# Altium PCB PCB_CANCELADOR.PcbDoc
Units mm, origin at the board's own origin, x right, y up, seen from the top; angles counter-clockwise.
Board outline 92.46 x 95.76 mm, 2 copper layers (Top Layer, Bottom Layer); 47 components, 59 nets, 174 pads, 17 vias.
Unrouted connection lines stored in the file: 82.
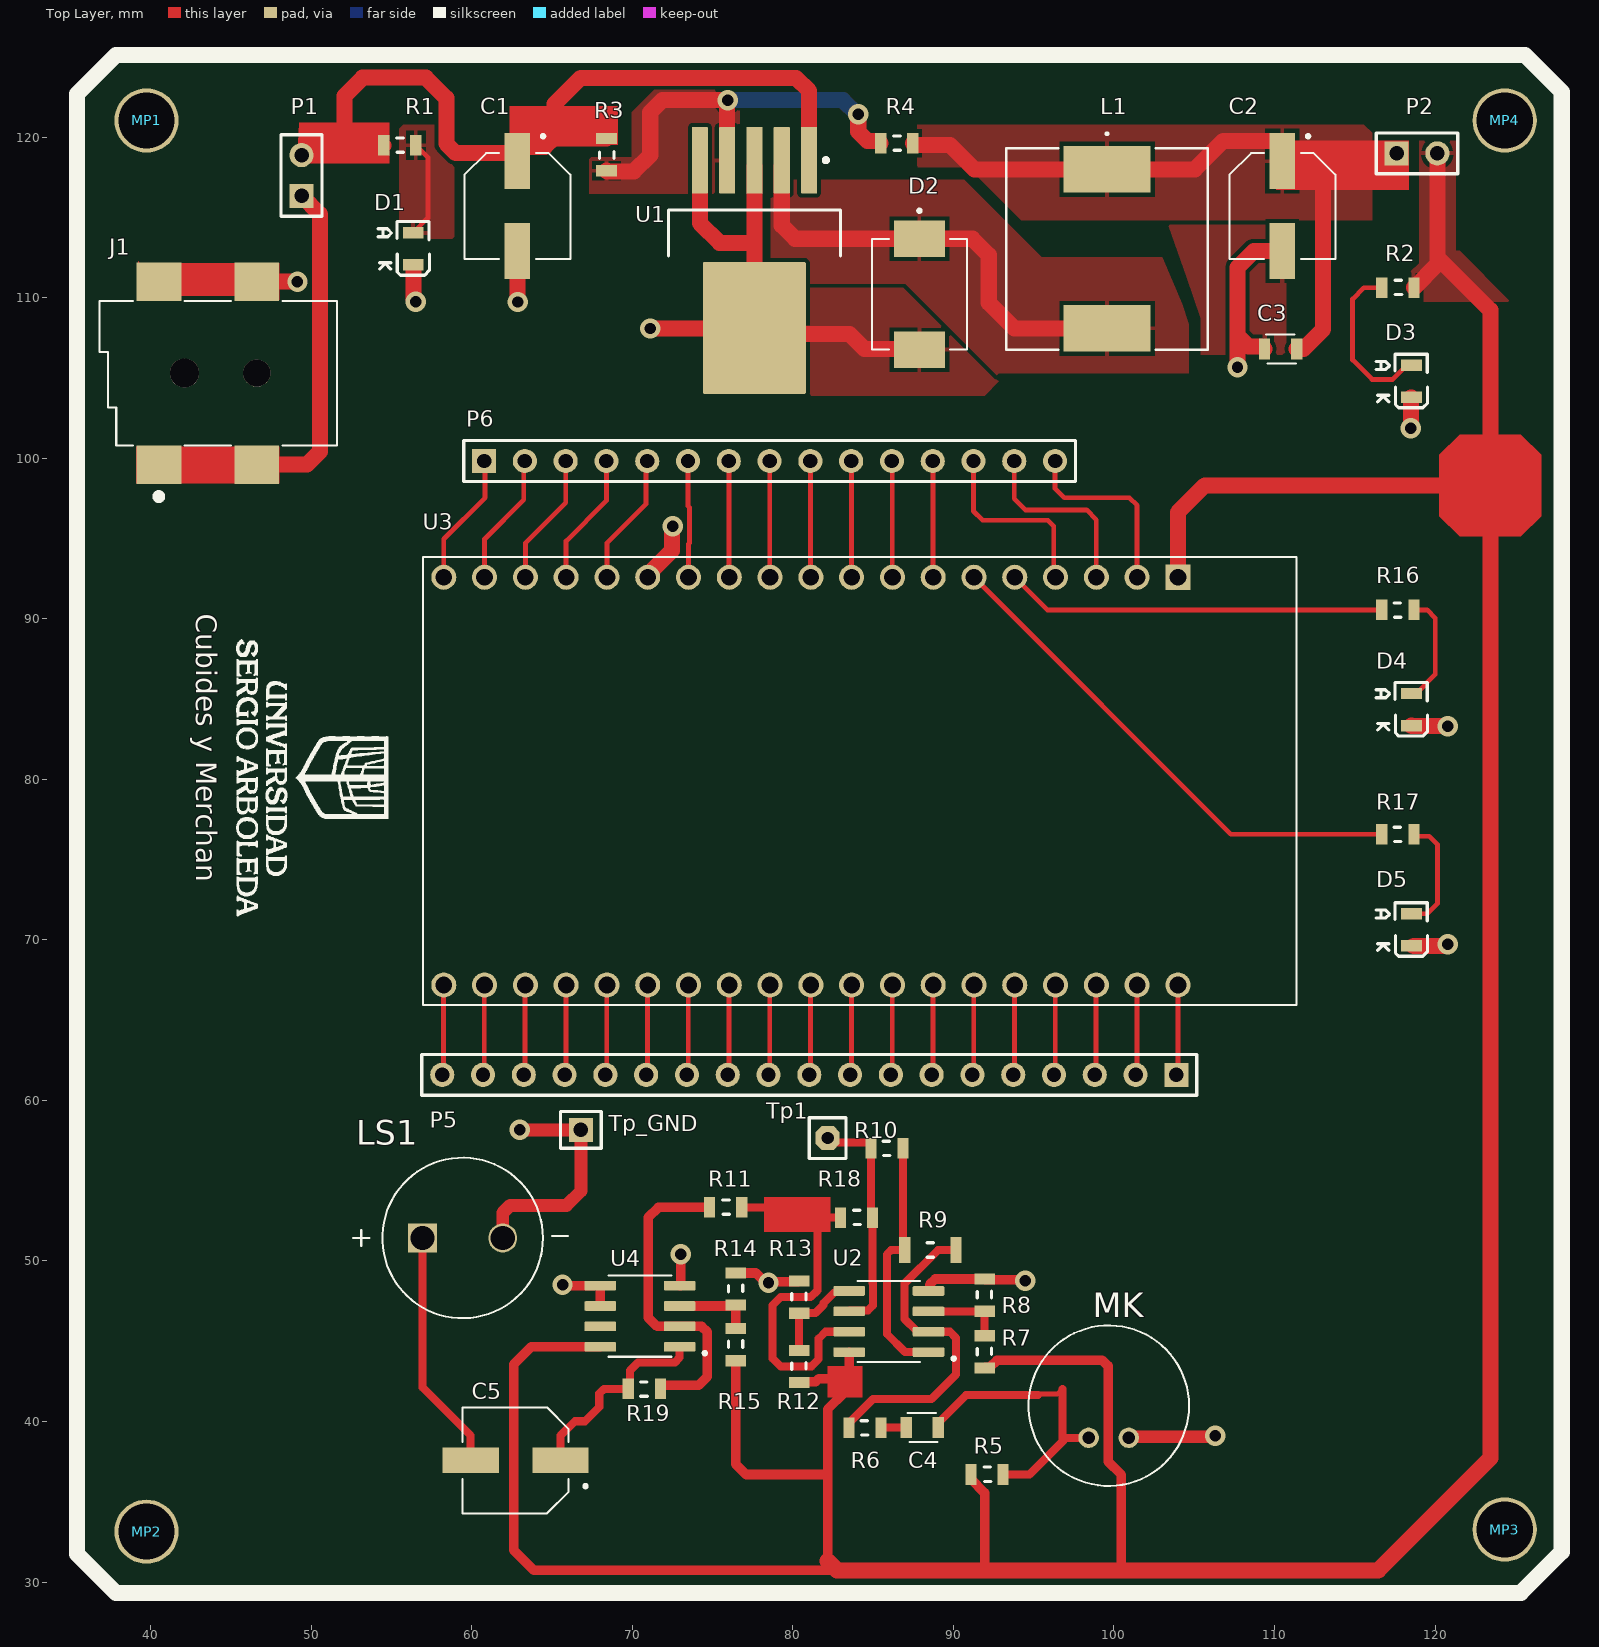
[diagram p0: Top Layer view]
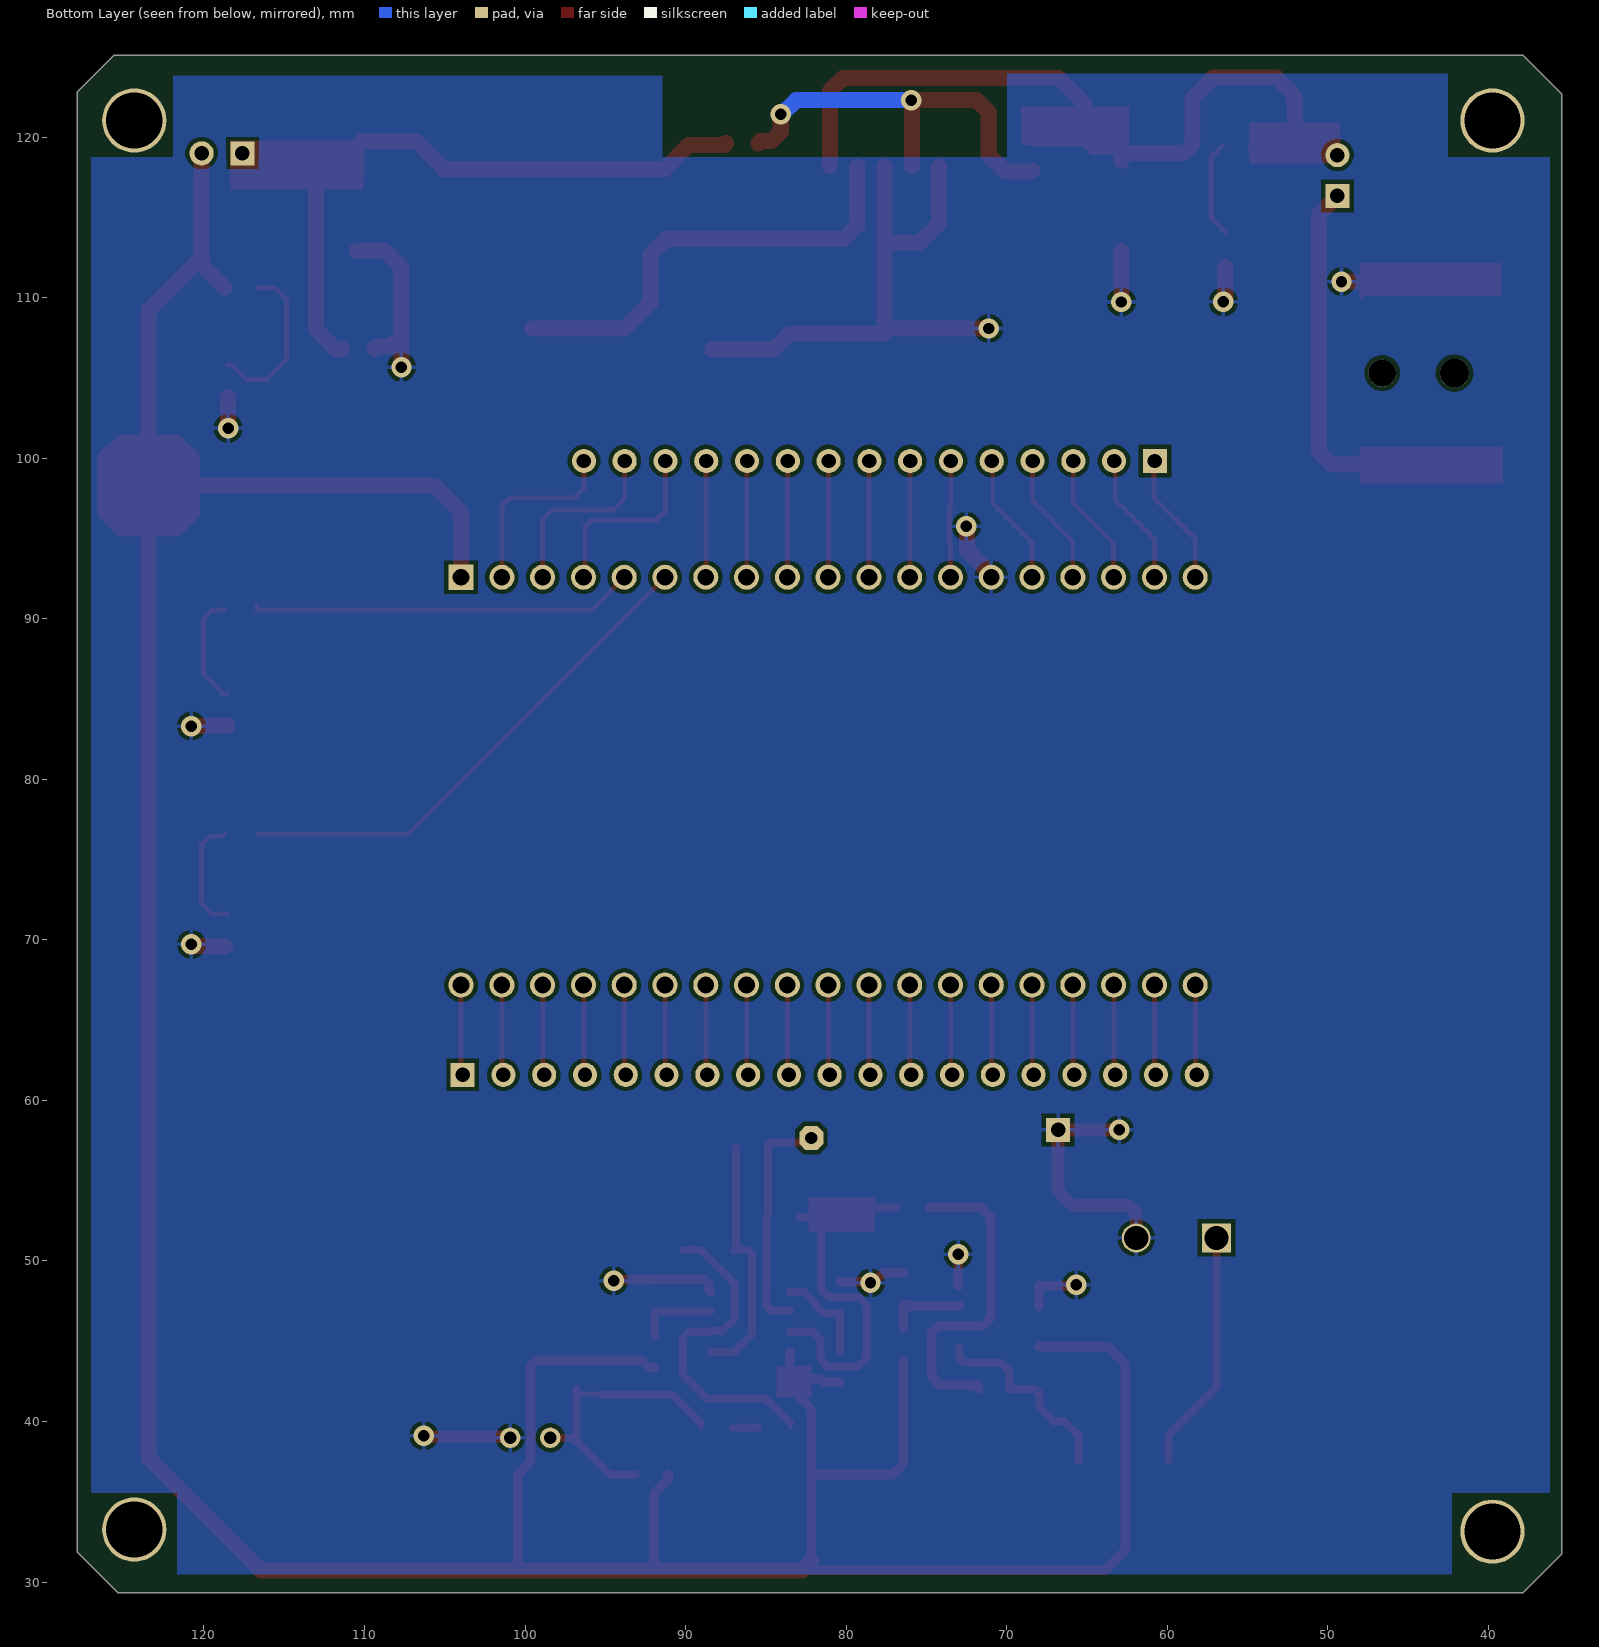
[diagram p1: Bottom Layer view, seen from below]

## Layer stack, top to bottom
Top Solder: solder mask 0.0102, Solder Resist, Dk 3.5
Top Layer: signal copper 0.0356
Dielectric 1: dielectric 0.32, FR-4, Dk 4.8
Bottom Layer: signal copper 0.0356
Bottom Solder: solder mask 0.0102, Solder Resist, Dk 3.5

## Board outline
35.433,31.75 35.433,122.682 37.846,125.095 125.603,125.095 125.666,125.031 127.889,122.809 127.889,31.877 125.349,29.337 37.846,29.337

## Design rules (kind name [scope] priority, off if disabled: settings)
Clearance [All] p1: gap=0.254 ignorepadtopadclearanceinfootprint=FALSE except(0: Arc-Hole Track-Hole SMDPad-Hole THPad-Hole Via-Hole Fill-Hole Poly-Hole Region-Hole Text-Hole)
HoleSize [All] p1: absolutevalues=TRUE maxlimit=3.52 minlimit=0.025 maxpercent=80.000 minpercent=20.000
PolygonConnect [All] p1: connectstyle=Relief reliefconductorwidth=0.254 reliefentries=4 polygonreliefangle="90 Angle" airgapwidth=0.254
RoutingVias [All] p1: holewidth=0.711 width=1.27 viastyle="Through Hole" minholewidth=0.711 minwidth=1.27 maxholewidth=0.711 maxwidth=1.27
SilkToSolderMaskClearance [IsPad] p1: minsilkscreentomaskgap=0.1 clearancetoexposedcopper=TRUE
SolderMaskExpansion [All] p1: expansion=0.102 istentingtop=FALSE
Width Width_GND [All] p1: maxlimit=3 minlimit=0.3 preferedwidth=0.8 minimp=50.000000 maximp=50.000000 favimp=50.000000
28 further rules are at their usual default settings.

## Classes and differential pairs
component class U_Etapa_Regulacion: C1 C2 C3 D1 D2 D3 J1 L1 P1 P2 R1 R2 R3 R4 U1
component class U_Etapa_Control_Ruido: C4 C5 D4 D5 LS1 MK MP1 MP2 MP3 MP4 P5 P6 R5 R6 R7 R8 R9 R10 R11 R12 R13 R14 R15 R16 R17 R18 R19 Tp1 Tp_GND U2 U3 U4

## Components (designator, comment, footprint, x,y, rotation, side; value= is the part's Value field where it differs from the comment)
C1 "100uF" CAP_16SVPG220M 62.845,115.702 r270 top
C2 "220uF" CAP_16SVPG220M 110.49,115.702 r270 top
C3 "0.1uF" CAPC4632X221N 109.329,106.807 r0 top
C4 "0.1uF" CAPC4632X221N 87.014,39.624 r0 top
C5 "100uF" CAP_16SVPG220M 62.738,37.582 r180 top
D1 "LED2" 3.2X1.6X1.1 56.368,113.796 r270 top
D2 "SS34" DIOM7959X265N 87.884,110.21 r270 top
D3 "LED2" 3.2X1.6X1.1 118.532,105.537 r270 top
D4 "LED2" 3.2X1.6X1.1 118.532,85.09 r270 top
D5 "LED2" 3.2X1.6X1.1 118.532,71.378 r270 top
J1 "*" CUI_PJ-002BH-SMT-TR 40.513,99.598 r180 top
L1 "33uH" IND_CDRH127/LDNP-470MC_SUM 99.568,113.038 r270 top
LS1 "Altavoz" SPKR_AST-1732MR-R 59.436,51.435 r0 top
MK "Microfono" CUI_CMA-6542PF 99.675,40.989 r90 top
MP1 "5205980-1" Tornillo 39.751,121.031 r0 top
MP2 "5205980-1" Tornillo 39.751,33.147 r0 top
MP3 "5205980-1" Tornillo 124.333,33.274 r0 top
MP4 "5205980-1" Tornillo 124.333,121.031 r0 top
P1 "Header 2" HDR1X2 49.403,116.332 r90 top
P2 "Header 2" HDR1X2 117.602,118.984 r0 top
P5 "Header 19" HDR1X19 103.886,61.595 r180 top
P6 "Header 15" HDR1X15 60.773,99.822 r0 top
R1 "Res3" J1-0805 55.27,119.485 r180 top value=330
R2 "Res3" J1-0805 117.434,110.617 r180 top value=330
R3 "Res3" J1-0805 68.397,119.152 r90 top value=1K
R4 "Res3" J1-0805 86.221,119.612 r180 top value=3.3K
R5 "Res3" J1-0805 91.847,36.703 r180 top value=10K
R6 "Res3" J1-0805 84.746,39.624 r0 top value=1K
R7 "Res3" J1-0805 91.948,44.089 r270 top value=10K
R8 "Res3" J1-0805 91.948,47.625 r270 top value=10K
R9 "Res3" J1-1206 87.72,50.673 r180 top value=470K
R10 "Res3" J1-0805 86.118,57.023 r0 top value=10k
R11 "Res3" J1-0805 75.565,53.34 r180 top value=10K
R12 "Res3" J1-0805 80.391,43.18 r270 top value=10k
R13 "Res3" J1-0805 80.391,47.498 r270 top value=10k
R14 "Res3" J1-0805 76.454,48.006 r270 top value=10k
R15 "Res3" J1-0805 76.454,44.542 r270 top value=10k
R16 "Res3" J1-0805 117.934,90.551 r0 top value=330
R17 "Res3" J1-0805 117.934,76.581 r0 top value=330
R18 "Res3" J1-0805 83.713,52.705 r180 top value=10k
R19 "Res3" J1-0805 71.005,42.037 r0 top value=30k
Tp1 "Test_point" Test_Point 82.169,57.658 r0 top
Tp_GND "Test_point" Test_point_GND 66.802,58.166 r90 top
U1 "LM2596S-ADJ/NOPB" KTT0005B_N 77.611,112.307 r270 top
U2 "LM358AMX/NOPB" SOIC127P599X175-8N 85.979,46.228 r180 top
U3 "*" MODULE_ESP32-DEVKITC-32D 84.223,79.883 r270 top
U4 "LM358AMX/NOPB" SOIC127P599X175-8N 70.481,46.562 r180 top

## Footprints (in the part's own frame and the unit in brackets; to place one, negate y for a bottom-side part, rotate by r counter-clockwise, add the part's x,y. Pads: shape width x height; smd on the part's side, far side on the other; paste and mask are expansions set on the pad)
3.2X1.6X1.1 [mm] "SMT LED; 2 Flat Leads"
  rect 0.7x1.28 smd: 1(-0.25,0) 2(1.75,0)
  silkscreen extent -0.94,-2.2 2.4,1
CAP_16SVPG220M [mm]
  rect 3.5x1.6 smd: 1(-2.8,0) 2(2.8,0)
  silkscreen extent -4.45,-3.3 3.3,3.3
CAPC4632X221N [mm]
  rect 0.7x1.3 smd: 1(0.05,0) 2(2.05,0)
  silkscreen extent 0.14,-0.9 2,0.9
CUI_CMA-6542PF [mm]
  round 1.278 hole 0.77: 1(-2,1.25) 2(-2,-1.25)
  silkscreen extent -5,-5 5,5
CUI_PJ-002BH-SMT-TR [mm]
  rect 2.8x2.4 smd: 1A(0,0) 1B(-6.1,0) 2(-6.1,-11.4) 3(0,-11.4)
  round 1.7 hole 1.7 unplated: ""(-6.1,-5.7)
  round 1.8 hole 1.8 unplated: ""(-1.6,-5.7)
  silkscreen extent -11.1,-10.2 3.7,2.19
DIOM7959X265N [mm]
  rect 2.25x3.18 smd: 1(3.455,0) 2(-3.455,0)
  silkscreen extent -5.3,-2.95 3.44,2.95
HDR1X2 [mm] "Connector; Header; 2 Position"
  rect 1.5x1.5 hole 0.9: 1(0,0)
  round 1.5 hole 0.9: 2(2.54,0)
  silkscreen extent -1.27,-1.27 3.81,1.27
HDR1X15 [mm] "Connector; Header; 15 Position"
  rect 1.5x1.5 hole 0.9: 1(0,0)
  round 1.5 hole 0.9: 2(2.54,0) 3(5.08,0) 4(7.62,0) 5(10.16,0) 6(12.7,0) 7(15.24,0) 8(17.78,0) 9(20.32,0) 10(22.86,0) 11(25.4,0) 12(27.94,0) 13(30.48,0) 14(33.02,0) 15(35.56,0)
  silkscreen extent -1.27,-1.27 36.83,1.27
HDR1X19 [mm] "Connector; Header; 19 Position"
  rect 1.5x1.5 hole 0.9: 1(0,0)
  round 1.5 hole 0.9: 2(2.54,0) 3(5.08,0) 4(7.62,0) 5(10.16,0) 6(12.7,0) 7(15.24,0) 8(17.78,0) 9(20.32,0) 10(22.86,0) 11(25.4,0) 12(27.94,0) 13(30.48,0) 14(33.02,0) 15(35.56,0) 16(38.1,0) 17(40.64,0) 18(43.18,0) 19(45.72,0)
  silkscreen extent -1.27,-1.27 46.99,1.27
IND_CDRH127/LDNP-470MC_SUM [mil]
  rect 114x213 smd: 1(-195,0) 2(195,0)
  silkscreen extent -285,-247 247,247
J1-0805 [mm] "Chip Resistor, Body 1.6x0.8mm, IPC High Density"
  rect 0.7x1.28 smd: 1(0.75,0) 2(-1.25,0)
  silkscreen extent -0.49,-0.46 -0.07,0.43, body extent -1.14,-0.37 0.56,0.59, height 0.9
J1-1206 [mm] "Chip Resistor, Body 1.6x0.8mm, IPC High Density"
  rect 0.7x1.62 smd: 1(0.75,0) 2(-2.45,0)
  silkscreen extent -1.05,-0.47 -0.64,0.44, body extent -1.74,-0.46 -0.04,0.5, height 0.9
KTT0005B_N [mm] "DPAK, 5-Leads, Body 10.65x9.65mm, Pitch 1.7mm, IPC Medium Density"
  rrect10% 4.15x1 smd: 1(-6.25,3.4) 2(-6.25,1.7) 3(-6.25,0) 4(-6.25,-1.7) 5(-6.25,-3.4)
  rrect2% 8.2x6.4 smd: 6(4.2,0)
  silkscreen extent -6.37,-5.35 -0.3,5.35, body extent -3.15,-5.32 6.5,5.33, height 4.83
MODULE_ESP32-DEVKITC-32D [mm]
  rect 1.56x1.56 hole 1.04: 1(-12.7,19.76)
  round 1.56 hole 1.04: 2(-12.7,17.22) 3(-12.7,14.68) 4(-12.7,12.14) 5(-12.7,9.6) 6(-12.7,7.06) 7(-12.7,4.52) 8(-12.7,1.98) 9(-12.7,-0.56) 10(-12.7,-3.1) 11(-12.7,-5.64) 12(-12.7,-8.18) 13(-12.7,-10.72) 14(-12.7,-13.26) 15(-12.7,-15.8) 16(-12.7,-18.34) 17(-12.7,-20.88) 18(-12.7,-23.42) 19(-12.7,-25.96) 20(12.7,19.76) 21(12.7,17.22) 22(12.7,14.68) 23(12.7,12.14) 24(12.7,9.6) 25(12.7,7.06) 26(12.7,4.52) 27(12.7,1.98) 28(12.7,-0.56) 29(12.7,-3.1) 30(12.7,-5.64) 31(12.7,-8.18) 32(12.7,-10.72) 33(12.7,-13.26) 34(12.7,-15.8) 35(12.7,-18.34) 36(12.7,-20.88) 37(12.7,-23.42) 38(12.7,-25.96)
  silkscreen extent -13.95,-27.25 13.95,27.15, body extent -13.97,-25.18 13.97,29.92, height 3.25
SOIC127P599X175-8N [mm]
  rrect25% 1.97x0.6 smd: 1(-2.47,1.905) 2(-2.47,0.635) 3(-2.47,-0.635) 4(-2.47,-1.905) 5(2.47,-1.905) 6(2.47,-0.635) 7(2.47,0.635) 8(2.47,1.905)
  silkscreen extent -4.14,-2.52 1.95,2.52, body extent -3,-2.45 3,2.45, height 1.75
SPKR_AST-1732MR-R [mm]
  rect 1.8x1.8 hole 1.5: 1(-2.5,0)
  round 1.8 hole 1.5: 2(2.5,0)
  silkscreen extent -6.81,-5 6.57,5
Test_Point [mm]
  oct 1.5x1.5 hole 0.77: 1(0,0)
  silkscreen extent -1.14,-1.27 1.14,1.27
Test_point_GND [mm]
  rect 1.5x1.5 hole 0.9: 1(0,0)
  silkscreen extent -1.14,-1.27 1.14,1.27
Tornillo [mm]
  round 4 hole 3.5: 1(0,0)

## Part data
C1 C2 C5: library part 16SVPG220M, Package=None, Availability=Unavailable, MP=16SVPG220M, Price=None
C3 C4: library part 1812CC104KAZ1A, "CAP,CERM,0.10UF,630V,X7R,1812; Dielectric Characteristic:X7R; Capacitance:100nF; Capacitance Tolerance:Â± 10%; Voltage Rating:630V; Temperature Coefficient:Â± 15%; Series:LT; Capacitor Case Style:1812; No. of Pins:2; Mounting Type:SMD; Operating Temperature Range:-55Â°C to +125Â°C; SVHC:No SVHC (18-Jun-2010)", Package=None, Availability=Unavailable, MP=1812CC104KAZ1A, Price=None
D1 D3 D4 D5: "Typical RED, GREEN, YELLOW, AMBER GaAs LED", LatestRevisionDate=17-Jul-2002, LatestRevisionNote="Re-released for DXP Platform.", PackageDescription="SM LED; 2 Flat Leads", PackageReference=3.2X1.6X1.1, PackageVersion=Feb-2002, Published=8-Jun-2000, Publisher="Altium Limited"
D2: "Diode Schottky 40V 3A Surface Mount SMC _DO-214AB_", Package="DO-214AB-214 ON Semiconductor", Availability=Unavailable, MF="ON Semiconductor", MP=SS34, Price=None, SnapEDA_Link=https://www.snapeda.com/parts/SS34/ON%20Semiconductor/view-part/4631325/?ref=snap
J1: library part PJ-002BH-SMT-TR, "2.5 x 6.5 mm, 5.0 A, Horizontal, Surface Mount _SMT_, Dc Power Jack Connector", Package=None, Availability=Unavailable, CUI_purchase_URL=https://www.cuidevices.com/product/interconnect/connectors/dc-power-connectors/jacks/pj-002bh-smt-tr?utm_source=snapeda.com&utm_medium=referral&utm_campaign=snapedaBOM, MF="CUI Devices", MP=PJ-002BH-SMT-TR, Price=None, SnapEDA_Link=https://www.snapeda.com/parts/PJ-002BH-SMT-TR/CUI%20Devices/view-part/378040/?ref=snap
L1: library part CDRH127/LDNP-470MC, "47ÂµH Shielded Inductor 3.25A 78mOhm Max Nonstandard", Package="Nonstandard Sumida", Check_prices=https://www.snapeda.com/parts/CDRH127/LDNP-470MC/Sumida%20America%20Components%20Inc./view-part/547921/?ref=eda, Digi-Key_Part_Number=308-1339-1-ND, MF="Sumida America", MP=CDRH127/LDNP-470MC, Purchase-URL=https://pricing.snapeda.com/search/part/CDRH127/LDNP-470MC/?ref=eda, SnapEDA_Link=https://www.snapeda.com/parts/CDRH127/LDNP-470MC/Sumida%20America%20Components%20Inc./view-part/547921/?ref=snap
LS1: library part AST-1732MR-R, "æ‰¬å£°å™¨.2W 32æ¬§å§†90DBA 1700HZ", Package=None, Availability="In Stock", Check_prices=https://www.snapeda.com/parts/AST-1732MR-R/PUI+Audio/view-part/?ref=eda, MF="PUI Audio", MP=AST-1732MR-R, Price=None, Purchase-URL=https://pricing.snapeda.com/search/part/AST-1732MR-R/?ref=eda, SnapEDA_Link=https://www.snapeda.com/parts/AST-1732MR-R/PUI+Audio/view-part/?ref=snap
MK: library part CMA-6542PF, "9.7 mm, Omnidirectional, PCB Mount, 4.5 Vdc, Electret Condenser Microphone", Package="CUI Inc.", Availability=Unavailable, CUI_purchase_URL=https://www.cuidevices.com/product/audio/microphones/electret-condenser-microphones/cma-6542pf?utm_source=snapeda.com&utm_medium=referral&utm_campaign=snapedaBOM, MF="CUI Devices", MP=CMA-6542PF, Price=None, SnapEDA_Link=https://www.snapeda.com/parts/CMA-6542PF/CUI%20Devices/view-part/316835/?ref=snap
MP1 MP2 MP3 MP4: library part CMP-03367-000025-1, "CONN D-SUB SCREW RETAINER MALE", Color=Yellow, Package Quantity=1, Depth=6.35mm, ELV=Compliant, Gender=Male, Lead Free="Lead Free", Length=7.1mm, Material=Steel, Mount=Screw, Packaging=Bag, Radiation Hardening=No, REACH SVHC="No SVHC", RoHS Compliant=Yes, Series=AMPLIMITE
P1 P2: "Header, 2-Pin", LatestRevisionDate=17-Jul-2002, LatestRevisionNote="Re-released for DXP Platform.", Publisher="Altium Limited"
P5: "Header, 19-Pin", LatestRevisionDate=17-Jul-2002, LatestRevisionNote="Re-released for DXP Platform.", Publisher="Altium Limited"
P6: "Header, 15-Pin", LatestRevisionDate=17-Jul-2002, LatestRevisionNote="Re-released for DXP Platform.", Publisher="Altium Limited"
R1 R2 R3 R4 R5 R6 R7 R8 R9 R10 R11 R12 R13 R14 R15 R16 R17 R18 R19: "Resistor", LatestRevisionDate=29-May-2009, LatestRevisionNote="IPC-7351 Footprint Added.", PackageDescription="Chip Resistor", PackageReference=J1-0603, Published=8-Jun-2000, Publisher="Altium Limited"
U1: library part CMP-0069-00271-3, "SIMPLE SWITCHER® Power Converter 150 KHz 3A Step-Down Voltage Regulator, 5-pin TO-263, Pb-Free", Manufacturer="Texas Instruments", PackageTopMarking="NSUZXYTTE#*LM2596S*-ADJ P+", PowerWise=N, Code_JEDEC=MO-169-AB, ComponentLink1Description="Datasheet URL", ComponentLink1URL=http://www.ti.com/general/docs/lit/getliterature.tsp?genericPartNumber=LM2596&fileType=pdf, CompType=Switcher, PackageDescription="TO-263, Molded, .400 x .390 x .180in, 5 Lead, .067in Pitch, Surface Mount", PackageReference=KTT0005B, PinCount=5, RoHS=Y
U2 U4: "2-Channel, 1MHz, industry standard, 32V op amp 8-SOIC 0 to 70", Package="SOIC-8 Texas Instruments", Availability=Good, Check_prices=https://www.snapeda.com/parts/LM358AMX/NOPB/Texas%20Instruments/view-part/18081/?ref=eda, MF="Texas Instruments", MP=LM358AMX/NOPB, Price=None, Purchase-URL=https://pricing.snapeda.com/search/part/LM358AMX/NOPB/?ref=eda, SnapEDA_Link=https://www.snapeda.com/parts/LM358AMX/NOPB/Texas%20Instruments/view-part/18081/?ref=snap
U3: library part ESP32-DEVKITC-32D, "EVAL BOARD FOR ESP-WROOM-32", Package=None, Availability=Warning, Check_prices=https://www.snapeda.com/parts/ESP32-DEVKITC-32D/Espressif%20Systems/view-part/2777395/?ref=eda, MF="Espressif Systems", MP=ESP32-DEVKITC-32D, Price=None, Purchase-URL=https://pricing.snapeda.com/search/part/ESP32-DEVKITC-32D/?ref=eda, SnapEDA_Link=https://www.snapeda.com/parts/ESP32-DEVKITC-32D/Espressif%20Systems/view-part/2777395/?ref=snap

## Via types
v1: diameter 1.27, hole 0.711, Top Layer to Bottom Layer, 17 vias

## Nets (pads, with @x,y where several pads share a name; then routed paths per layer and width w, separated by ;. In a path a pad name is that pad's centre, name@x,y a point inside that pad or via, vN(x,y) a via of type N, cw(c..) or ccw(c..) an arc to the next point about the centre after c; other vN are vias at no path point)
GND: C1.2 C2.2 C3.1 D1.2 D2.1 D3.2 D4.2 D5.2 J1.2 J1.3 LS1.2 MK.2 R8.2 R13.2 R14.2 Tp_GND.1 U1.3 U1.5 U1.6 U2.4 U3.14 U4.4 U4.5 U4.6 | length 109.1
  Top Layer w0.6: v1(65.659,48.514) 65.706,48.467 U4.5 U4.6 ; U4.4 73.025,48.467 v1(73.025,50.419) ; R14.2 77.698,49.256 78.313,48.641 v1(78.486,48.641) 78.543,48.698 80.341,48.698 R13.2 ; U2.4 88.519,48.133 88.519,48.524 88.87,48.875 91.924,48.875 91.974,48.825 94.428,48.825 v1(94.485,48.768)
  Top Layer w0.8: LS1.2 61.936,52.998 62.405,53.467 65.913,53.467 66.802,54.356 Tp_GND.1 v1(62.992,58.166) ; MK.2 100.989,39.052 106.236,39.052 v1(106.299,39.116)
  Top Layer w1: J1.3 J1.2 v1(49.149,110.998) ; D1.2@56.378,111.896 56.378,109.941 56.515,109.804 v1(56.515,109.731) ; C1.2@62.845,111.952 C1.2 62.855,112.892 62.855,109.738 v1(62.865,109.728) ; U3.14@70.84,92.609 70.84,92.612 72.465,94.237 72.465,95.706 v1(72.517,95.758) ; v1(71.12,108.077) 77.581,108.077 U1.6 ; U1.5@74.211,118.177 74.211,114.638 75.438,113.411 77.611,113.411 ; U1.3@77.611,118.177 77.611,113.411 ; D2.1@88.349,106.755 D2.1 87.832,106.807 84.455,106.807 83.535,107.727 77.611,107.727 U1.6 ; v1(107.696,105.664) 107.696,107.629 ; C3.1 109.229,106.957 108.368,106.957 107.696,107.629 ; C2.2 108.711,112.902 107.696,111.887 107.696,107.629 ; v1(118.491,101.854) 118.512,101.875 118.512,103.766 D3.2 ; D4.2 118.546,83.326 120.763,83.326 v1(120.777,83.312) ; D5.2@118.672,69.612 120.593,69.612 120.704,69.723 v1(120.777,69.723) ; U1.6 77.611,113.411
  Bottom Layer w0.8: v1(49.149,110.998) 49.276,110.871 49.276,110.908 v1@49.366,110.998
Led_r: R17.2 U3.6 | length 32.1
  Top Layer w0.3: U3.6@91.298,92.598 U3.6 107.285,76.581 R17.2
Led_v: R16.2 U3.5 | length 24
  Top Layer w0.3: U3.5@93.838,92.598 U3.5 95.855,90.551 R16.2 R16.2@116.684,90.841
NetC1_1: C1.1 P1.2 R1.1 R3.1 U1.1 | length 53.6
  Top Layer w1: P1.2 49.499,118.968 51.404,118.968 52.07,119.634 ; R1.1 52.219,119.485 52.07,119.634 ; C1.1 C1.1@62.845,118.699 ; R3.1 65.215,119.902 65.151,119.966 ; U1.1@81.011,118.177 81.011,122.873 80.194,123.69 66.794,123.69 65.151,122.047 65.151,119.966 ; 52.07,119.634 52.07,122.555 53.213,123.698 57.15,123.698 58.42,122.428 58.42,119.585 59.006,118.999 62.545,118.999 C1.1@62.845,118.699 ; C1.1@62.845,118.699 62.845,119.08 63.145,119.38 64.565,119.38 65.151,119.966
NetC2_1: C2.1 C3.2 L1.1 P2.1 R4.2 | length 45.8
  Top Layer w1: R4.2 87.576,119.507 89.789,119.507 91.305,117.991 L1.1 105.037,117.991 106.807,119.761 109.231,119.761 109.24,119.752 110.19,119.752 110.49,119.452 C2.1 110.49,117.552 110.79,117.252 112.444,117.252 115.87,117.252 P2.1 ; C3.2 111.809,106.807 113.03,108.028 113.03,117.221
NetC4_1: C4.1 R6.1 | length 1.6
  Top Layer w0.5: R6.1 C4.1
NetC4_2: C4.2 MK.1 R5.2 | length 18.5
  Top Layer w0.3: C4.2 C4.2@89.064,39.924 ; 95.269,41.656 95.325,41.712 96.47,41.712 96.795,42.037
  Top Layer w0.5: C4.2@89.064,39.924 90.796,41.656 95.269,41.656 ; R5.2 94.742,36.703 96.795,38.756 ; 96.795,42.037 96.795,38.756 ; MK.1 97.028,38.989 96.795,38.756
NetC5_1: C5.1 R19.2 U4.1 | length 12.8
  Top Layer w0.5: C5.1 65.538,39.132 66.426,40.02 67.057,40.02 67.945,40.907 67.945,41.744 68.238,42.037 R19.2 69.85,42.132 69.85,43.18 70.358,43.688 72.658,43.688 72.951,43.981 U4.1
NetC5_2: C5.2 LS1.1 | length 15.1
  Top Layer w0.5: LS1.1 56.936,42.134 59.938,39.132 C5.2
NetD1_1: D1.1 R1.2 | length 6.1
  Top Layer w0.3: D1.1@56.363,114.051 57.277,114.965 57.277,118.728 R1.2
NetD2_2: D2.2 L1.2 U1.2 | length 28.3
  Top Layer w1: U1.2@79.311,118.177 79.311,114.491 80.137,113.665 D2.2 91.186,113.665 92.202,112.649 92.202,109.679 93.795,108.085 L1.2
NetD3_1: D3.1 R2.1 | length 10.4
  Top Layer w0.3: R2.1 115.57,110.617 114.86,109.907 114.86,106.12 116.078,104.902 117.357,104.902 118.242,105.787 D3.1
NetD4_1: D4.1 R16.1 | length 7
  Top Layer w0.3: D4.1 118.822,85.34 120.015,86.533 120.015,90.043 119.507,90.551 R16.1
NetD5_1: D5.1 R17.1 | length 7.3
  Top Layer w0.3: D5.1 119.507,71.628 120.142,72.263 120.142,75.946 119.634,76.454 118.811,76.454 R17.1
NetJ1_1A: J1.1A J1.1B P1.1 | length 26.8
  Top Layer w1: J1.1A J1.1B 49.741,99.598 50.546,100.403 50.546,115.189 P1.1
NetP5_1: P5.1 U3.20 | length 5.6
  Top Layer w0.3: P5.1 103.983,61.692 U3.20
NetP5_2: P5.2 U3.21 | length 5.6
  Top Layer w0.3: P5.2 101.428,61.677 101.428,67.168 U3.21
NetP5_3: P5.3 U3.22 | length 5.6
  Top Layer w0.3: P5.3 98.888,61.677 98.888,67.168 U3.22
NetP5_4: P5.4 U3.23 | length 5.6
  Top Layer w0.3: P5.4 96.348,61.677 96.348,67.168 U3.23
NetP5_5: P5.5 U3.24 | length 5.6
  Top Layer w0.3: P5.5 93.808,61.677 93.808,67.168 U3.24
NetP5_6: P5.6 U3.25 | length 5.6
  Top Layer w0.3: P5.6 91.268,61.677 91.268,67.168 U3.25
NetP5_7: P5.7 U3.26 | length 5.6
  Top Layer w0.3: P5.7 88.728,61.677 88.728,67.168 U3.26
NetP5_8: P5.8 U3.27 | length 5.6
  Top Layer w0.3: P5.8 86.188,61.677 86.188,67.168 U3.27
NetP5_9: P5.9 U3.28 | length 5.6
  Top Layer w0.3: P5.9 83.648,61.677 83.648,67.168 U3.28
NetP5_10: P5.10 U3.29 | length 5.6
  Top Layer w0.3: P5.10 81.108,61.677 81.108,67.168 U3.29
NetP5_11: P5.11 U3.30 | length 5.6
  Top Layer w0.3: P5.11 78.568,61.677 78.568,67.168 U3.30
NetP5_12: P5.12 U3.31 | length 5.6
  Top Layer w0.3: P5.12 76.028,61.677 76.028,67.168 U3.31
NetP5_13: P5.13 U3.32 | length 5.6
  Top Layer w0.3: P5.13 73.488,61.677 73.488,67.168 U3.32
NetP5_14: P5.14 U3.33 | length 5.6
  Top Layer w0.3: P5.14 70.948,61.677 70.948,67.168 U3.33
NetP5_15: P5.15 U3.34 | length 5.6
  Top Layer w0.3: P5.15 68.408,61.677 68.408,67.168 U3.34
NetP5_16: P5.16 U3.35 | length 5.6
  Top Layer w0.3: P5.16 65.868,61.677 65.868,67.168 U3.35
NetP5_17: P5.17 U3.36 | length 5.6
  Top Layer w0.3: P5.17 63.328,61.677 63.328,67.168 U3.36
NetP5_18: P5.18 U3.37 | length 5.6
  Top Layer w0.3: P5.18 60.788,61.677 60.788,67.168 U3.37
NetP5_19: P5.19 U3.38 | length 5.6
  Top Layer w0.3: P5.19 58.248,61.677 58.248,67.168 U3.38
NetP6_1: P6.1 U3.19 | length 8.3
  Top Layer w0.3: U3.19 58.263,94.966 60.833,97.536 60.833,99.762 P6.1
NetP6_2: P6.2 U3.18 | length 8.3
  Top Layer w0.3: U3.18@60.654,92.583 U3.18@60.674,92.603 ; U3.18 60.803,94.966 63.246,97.409 63.246,99.755 P6.2
NetP6_3: P6.3 U3.17 | length 8.3
  Top Layer w0.3: U3.17 63.343,92.732 63.343,94.712 65.853,97.222 P6.3
NetP6_4: P6.4 U3.16 | length 8.8
  Top Layer w0.3: U3.16@65.697,92.621 U3.16@65.734,92.583 ; U3.16@66.04,92.74 U3.16 65.883,94.839 68.393,97.349 P6.4 P6.4@68.199,99.628
NetP6_5: P6.5 U3.15 | length 8.3
  Top Layer w0.3: U3.15 68.423,94.712 70.866,97.155 70.866,99.755 P6.5
NetP6_6: P6.6 U3.13 | length 7.3
  Top Layer w0.3: P6.6 73.473,97.027 73.556,96.944 73.556,94.703 73.503,94.65 U3.13
NetP6_7: P6.7 U3.12 | length 7.3
  Top Layer w0.3: P6.7 76.028,99.807 76.028,92.598 U3.12
NetP6_8: P6.8 U3.11 | length 7.3
  Top Layer w0.3: P6.8 78.568,99.807 78.568,92.598 U3.11
NetP6_9: P6.9 U3.10 | length 7.3
  Top Layer w0.3: P6.9 81.108,99.807 81.108,92.598 U3.10
NetP6_10: P6.10 U3.9 | length 7.3
  Top Layer w0.3: P6.10 83.648,99.807 83.648,92.598 U3.9
NetP6_11: P6.11 U3.8 | length 7.3
  Top Layer w0.3: P6.11 86.188,99.807 86.188,92.598 U3.8
NetP6_12: P6.12 U3.7 | length 7.3
  Top Layer w0.3: P6.12 88.728,99.807 88.728,92.598 U3.7
NetP6_13: P6.13 U3.4 | length 11.7
  Top Layer w0.3: P6.13 91.253,96.707 91.821,96.139 95.885,96.139 96.256,95.768 U3.4@96.256,92.69
  Top Layer w1: U3.4@96.256,92.69 U3.4
NetP6_14: P6.14 U3.3 | length 11.6
  Top Layer w0.3: P6.14 93.793,97.469 94.488,96.774 98.298,96.774 98.903,96.169 U3.3
NetP6_15: P6.15 U3.2 | length 11.7
  Top Layer w0.3: P6.15 96.333,98.104 96.901,97.536 100.965,97.536 101.443,97.058 U3.2
NetR3_2: R3.2 R4.1 U1.4 | length 26.4
  Top Layer w1: R3.2 68.442,117.856 70.104,117.856 71.12,118.872 71.12,121.539 71.882,122.301 v1(75.946,122.301) 75.911,122.266 U1.4 U1.4@75.911,118.177 ; v1(84.074,121.412) 84.074,120.338 84.66,119.752 85.331,119.752 R4.1
  Bottom Layer w1: v1(75.946,122.301) 83.112,122.301 84.001,121.412 v1(84.074,121.412)
NetR6_2: R6.2 R9.2 U2.2 | length 20.5
  Top Layer w0.3: R6.2 R6.2@83.496,39.914
  Top Layer w0.5: R6.2@83.496,39.914 84.984,41.402 88.646,41.402 90.17,42.926 90.17,45.212 89.789,45.593 U2.2 88.399,45.643 87.714,45.643 86.96,46.397 86.96,48.598 89.035,50.673 R9.2
NetR7_2: R7.2 R8.1 U2.3 | length 5
  Top Layer w0.5: U2.3 88.455,46.869 91.942,46.869 R8.1 R7.2
NetR9_1: R9.1 R10.1 U2.1 | length 15.6
  Top Layer w0.5: R10.1 86.868,52.114 86.87,52.112 86.87,50.773 R9.1 86.106,50.673 85.852,50.419 85.852,45.466 86.995,44.323 U2.1
NetR11_1: R11.1 R19.1 U4.2 | length 20.5
  Top Layer w0.6: R19.1 71.755,42.218 71.805,42.268 74.145,42.268 74.676,42.799 74.676,45.575 74.325,45.927 U4.2 71.548,45.927 70.993,46.482 70.993,52.705 71.628,53.34 R11.1
NetR11_2: R11.2 R18.1 U2.7 | length 23.6
  Top Layer w0.5: R11.2 80.987,53.34 81.661,52.666 81.7,52.705 R18.1 ; 81.661,52.197 81.661,52.07 81.535,51.944 81.535,48.172 81.114,47.752 79.248,47.752 78.74,47.244 78.74,43.942 79.248,43.434 81.153,43.434 81.61,43.891 81.61,45.161 82.042,45.593 U2.7
NetR12_2: R12.2 R13.1 U2.5 | length 6.1
  Top Layer w0.5: R12.2 R13.1 80.412,46.769 81.42,46.769 81.915,47.264 81.915,47.371 82.627,48.083 83.459,48.083 U2.5
NetR14_1: R14.1 R15.2 U4.3 | length 5
  Top Layer w0.6: U4.3 76.105,47.197 76.164,47.256 R14.1 R15.2
out1: R10.2 R18.2 Tp1.1 U2.6 | length 14.6
  Top Layer w0.5: Tp1.1 82.44,57.387 84.768,57.387 84.868,57.287 R10.2 84.863,57.018 84.863,52.805 R18.2 84.963,48.633 84.998,48.598 84.998,47.241 84.67,46.913 83.559,46.913 U2.6
Vin: P2.2 R2.2 R5.1 R7.1 R12.1 R15.1 U2.8 U3.1 U4.8 | length 248.7
  Top Layer w0.6: U4.8 63.707,44.657 62.611,43.561 62.611,32.004 63.881,30.734 82.755,30.734 ; R15.1 76.454,37.338 77.089,36.703 82.169,36.703 ; R12.1 80.441,42.48 81.423,42.48 81.615,42.672 82.296,42.672 83.185,41.783 ; 82.169,31.32 82.169,36.703 ; U2.8 83.509,42.107 83.185,41.783 ; 90.678,30.734 90.783,30.839 ; R5.1 91.097,36.413 91.948,35.562 91.948,30.861 92.075,30.734 ; R7.1 91.998,43.389 92.288,43.389 92.714,43.815 99.282,43.815 99.633,43.464 99.633,37.511 100.457,36.687 100.457,30.734 ; 82.169,36.703 82.169,40.767 83.185,41.783
  Top Layer w1: 82.169,31.32 82.755,30.734 90.678,30.734 92.075,30.734 100.457,30.734 116.459,30.734 123.444,37.719 123.444,98.298 ; U3.1 103.983,96.617 105.664,98.298 123.444,98.298 ; R2.2 118.694,110.617 120.142,112.065 P2.2 ; 120.142,112.522 123.444,109.22 123.444,98.298
pads on no net: J1. MP1.1 MP2.1 MP3.1 MP4.1 U4.7

## Polygon pours and split planes (outlines as drawn)
NetR3_2 on Top Layer "NETR3_2_L01_P014" (solid, pour order 14): 67.31,118.618 67.437,118.745 69.977,118.745 69.977,121.539 71.374,122.936 76.708,122.936 76.708,116.205 76.581,116.078 76.2,116.459 67.31,116.459
Vin on Top Layer "VIN_L01_P013" (solid, pour order 13): 118.999,119.761 118.999,119.507 118.999,112.141 117.602,110.744 117.602,109.728 124.714,109.728 121.539,112.903 121.285,112.903 121.285,119.761
NetD1_1 on Top Layer "NETD1_1_L01_P012" (solid, pour order 12): 55.499,113.665 55.499,120.523 55.753,120.777 57.658,120.777 57.658,119.38 58.928,118.11 58.928,113.665 58.923,113.66
GND on Top Layer "GND_L01_P010" (solid, pour order 10): 104.521,111.252 105.41,108.712 105.41,106.426 110.49,106.426 110.744,106.68 110.744,114.681 103.505,114.681 103.378,114.554
GND on Top Layer "GND_L01_P009" (solid, pour order 9): 74.422,110.617 86.868,110.617 87.249,110.236 87.376,110.236 92.837,104.775 91.948,103.886 74.422,103.886
NetC2_1 on Top Layer "NETC2_1_L01_P006" (solid, pour order 6): 87.63,118.11 87.757,118.237 87.757,120.777 115.57,120.777 116.078,120.269 116.078,114.808 94.234,114.808 90.932,118.11 87.503,118.11
NetD2_2 on Top Layer "NETD2_2_L01_P005" (solid, pour order 5): 78.74,118.364 78.613,118.237 78.613,110.871 86.995,110.871 92.71,105.156 92.837,105.283 104.648,105.283 104.648,108.331 104.267,109.601 102.997,112.522 95.504,112.522 90.678,117.348 79.883,117.348 78.994,116.459
GND on Bottom Layer "GND_L02_P017" (solid, pour order 17): 121.92,116.205 121.92,123.825 91.44,123.825 91.44,116.205
GND on Bottom Layer "GND_L02_P016" (solid, pour order 16): 42.545,117.602 42.545,123.952 69.977,123.952 69.977,117.602
GND on Bottom Layer "GND_L02_P015" (solid, pour order 15): 36.195,118.745 127,118.745 127,35.56 121.666,35.56 121.666,30.48 42.291,30.48 42.291,35.56 36.195,35.56

## Other copper
Top Layer:
  region net NetC1_1: 69.088,119.507 62.357,119.507 62.357,121.92 69.088,121.92
  region net NetR11_2: 78.232,53.975 82.331,53.975 82.331,51.816 78.232,51.816
  region net Vin: 82.169,43.434 84.328,43.434 84.328,41.529 82.169,41.529
  region net Vin: 120.269,100.203 120.269,96.393 121.539,95.123 125.349,95.123 126.619,96.393 126.619,100.203 125.349,101.473 121.539,101.473
  region net NetC1_1: 49.149,118.364 54.864,118.364 54.864,120.904 49.276,120.904
  region net NetC2_1: 118.364,119.761 110.199,119.761 110.109,119.671 110.109,116.713 118.364,116.713
  region net NetJ1_1A: 39.116,100.711 48.006,100.711 48.006,98.425 39.116,98.425
  region net GND: 39.243,112.268 39.37,112.141 48.006,112.141 48.006,109.855 47.752,110.109 39.243,110.109

## Silkscreen, mask and mechanical layers (free items; w line width, h text height)
Top Overlay:
  drawing of 36 lines, arcs and shapes, not listed
  text "Cubides y Merchan" at 42.841,90.297 h1.27 r270